# Altium PCB TXdispatcherBoard.PcbDoc
Units mm, origin at the board's own origin, x right, y up, seen from the top; angles counter-clockwise.
Board outline 63.5 x 48.26 mm, 2 copper layers (Top Layer, Bottom Layer); 12 components, 33 nets, 117 pads, 3 vias.
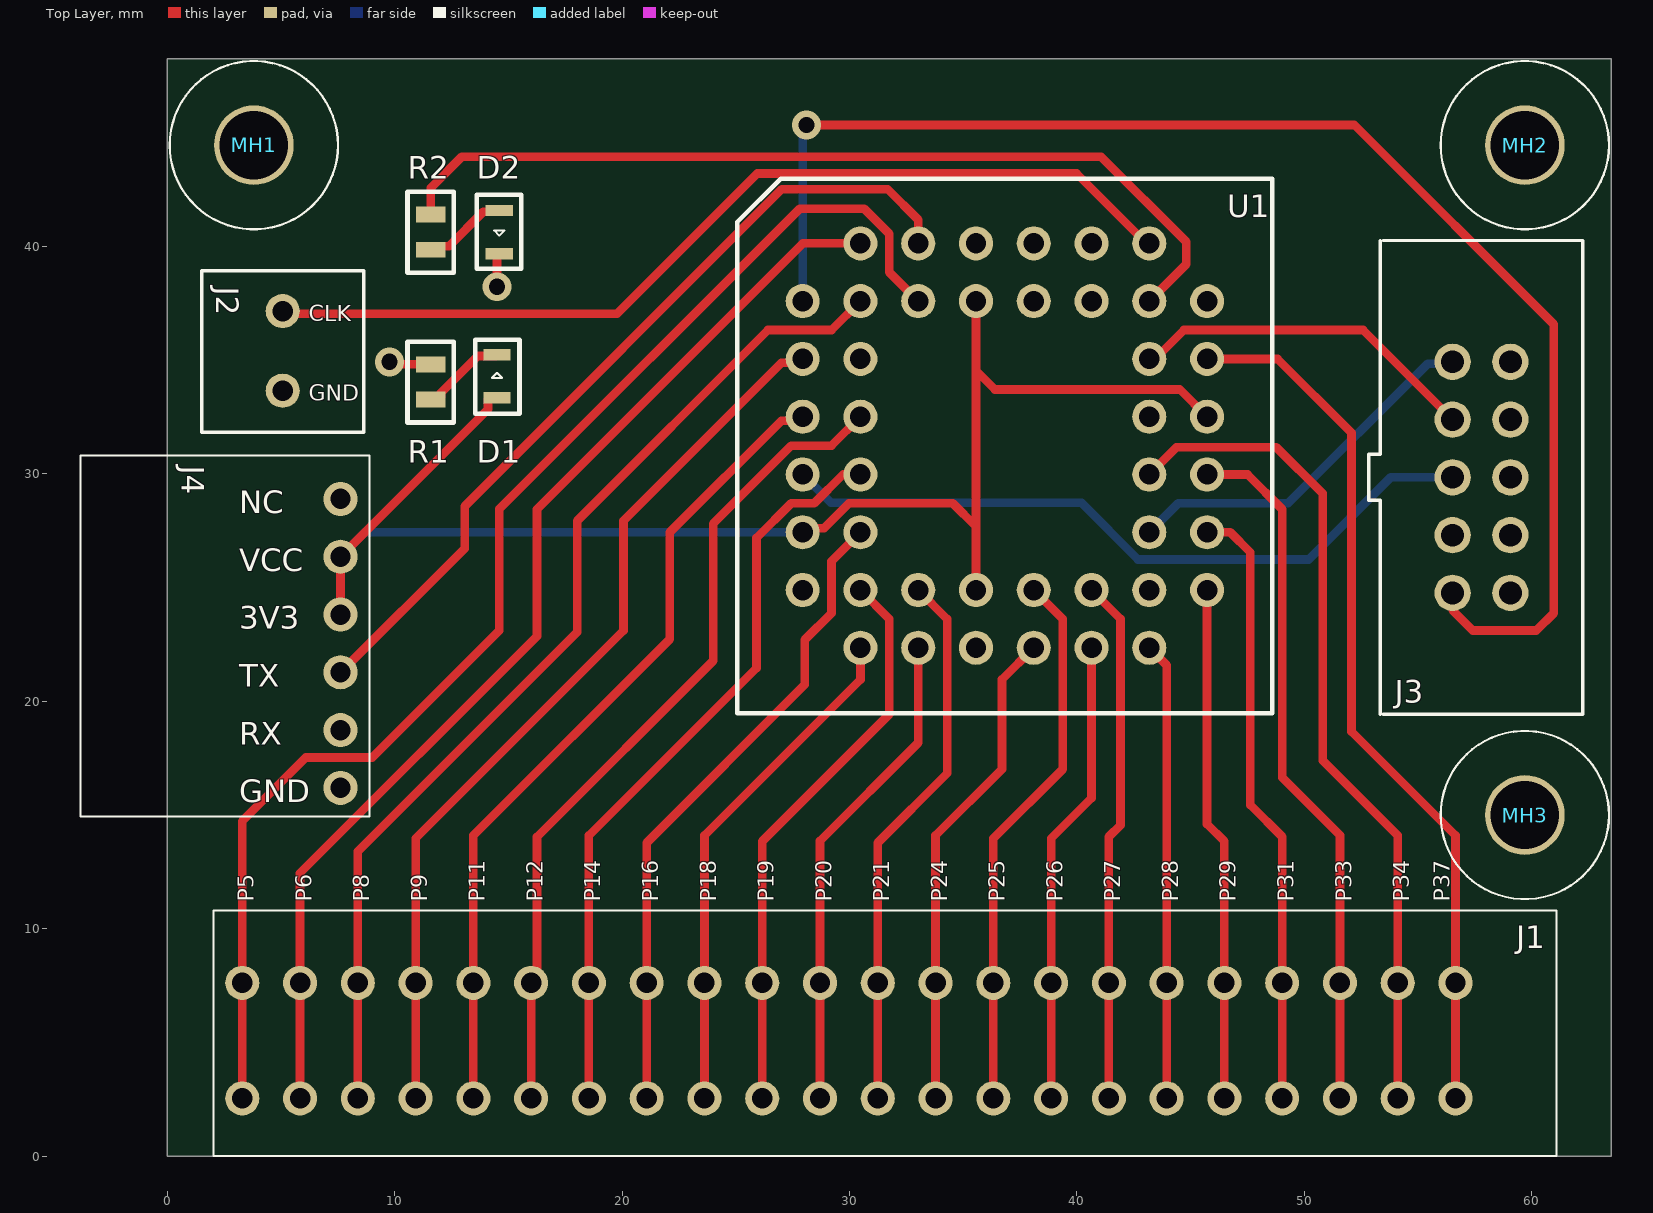
[diagram p0: Top Layer view]
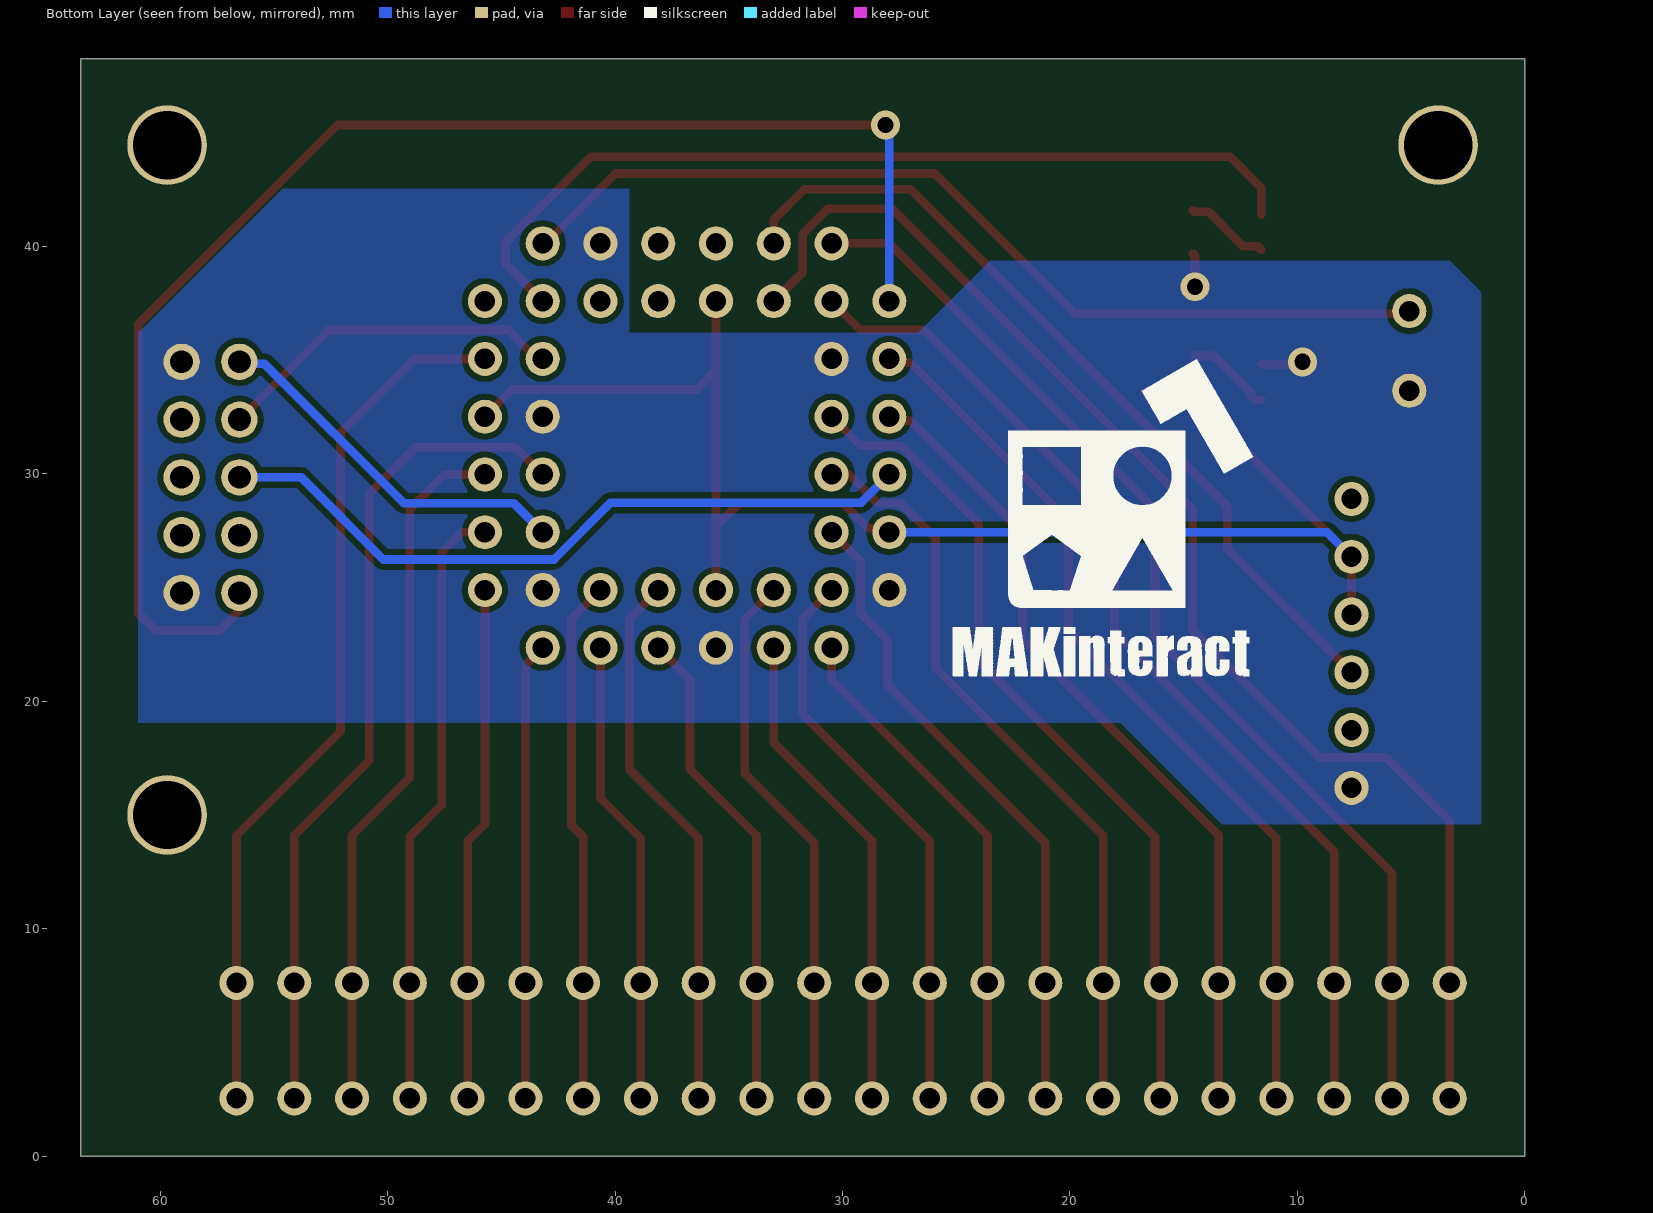
[diagram p1: Bottom Layer view, seen from below]

## Layer stack, top to bottom
Top Solder: solder mask 0.0102, Solder Resist, Dk 3.5
Top Layer: signal copper 0.0356
Dielectric 1: dielectric 0.32, FR-4, Dk 4.8
Bottom Layer: signal copper 0.0356
Bottom Solder: solder mask 0.0102, Solder Resist, Dk 3.5

## Board outline
0,0 63.5,0 63.5,48.26 0,48.26

## Design rules (kind name [scope] priority, off if disabled: settings)
Clearance [All] p1: gap=0.254 ignorepadtopadclearanceinfootprint=FALSE except(0: Arc-Hole Track-Hole SMDPad-Hole THPad-Hole Via-Hole Fill-Hole Poly-Hole Region-Hole Text-Hole)
HoleSize [All] p1: absolutevalues=TRUE maxlimit=7.62 minlimit=0.025 maxpercent=80.000 minpercent=20.000
PolygonConnect [All] p1: connectstyle=Direct reliefconductorwidth=0.254 reliefentries=4 polygonreliefangle="90 Angle" airgapwidth=0.254
RoutingVias [All] p1: holewidth=0.711 width=1.27 viastyle="Through Hole" minholewidth=0.711 minwidth=1.27 maxholewidth=0.711 maxwidth=1.27
SolderMaskExpansion [All] p1: expansion=0.102
Width [All] p1: maxlimit=0.381 minlimit=0.178 preferedwidth=0.254
29 further rules are at their usual default settings.

## Classes and differential pairs
component class TXdispatcherBoard: D1 D2 J2 J3 J4 MH1 MH2 MH3 R1 R2 U1

## Components (designator, comment, footprint, x,y, rotation, side; value= is the part's Value field where it differs from the comment)
D1 "LED0805" LED0805 14.5,34.29 r270 top
D2 "LED0805" LED0805 14.605,40.627 r90 top
J1 "141R-22P" 141R-22P 56.642,7.62 r180 top
J2 "282837-2" 282837-2 5.08,37.155 r270 top
J3 "ALTERA BLASTER" ALTERA_BLASTER 56.515,34.925 r270 top
J4 "USB_FTDI_CONVERTER" USB_FTDI 7.62,28.895 r270 top
MH1 "MH 3.2mm NP" MH3.0MM 3.81,44.45 r0 top
MH2 "MH 3.2mm NP" MH3.0MM 59.69,44.45 r0 top
MH3 "MH 3.2mm NP" MH3.0MM 59.69,15 r0 top
R1 "300" R0805 11.582,34.036 r270 top
R2 "300" R0805 11.582,40.627 r90 top
U1 "EPM3064ALC44-10" PLCC44_DIP 36.83,31.242 r0 top

## Footprints (in the part's own frame and the unit in brackets; to place one, negate y for a bottom-side part, rotate by r counter-clockwise, add the part's x,y. Pads: shape width x height; smd on the part's side, far side on the other; paste and mask are expansions set on the pad)
141R-22P [mm]
  round 1.5 hole 0.9: 1(53.34,0) 1(53.34,5.08) 2(50.8,0) 2(50.8,5.08) 3(48.26,0) 3(48.26,5.08) 4(45.72,0) 4(45.72,5.08) 5(43.18,0) 5(43.18,5.08) 6(40.64,0) 6(40.64,5.08) 7(38.1,0) 7(38.1,5.08) 8(35.56,0) 8(35.56,5.08) 9(33.02,0) 9(33.02,5.08) 10(30.48,0) 10(30.48,5.08) 11(27.94,0) 11(27.94,5.08) 12(25.4,0) 12(25.4,5.08) 13(22.86,0) 13(22.86,5.08) 14(20.32,0) 14(20.32,5.08) 15(17.78,0) 15(17.78,5.08) 16(15.24,0) 16(15.24,5.08) 17(12.7,0) 17(12.7,5.08) 18(10.16,0) 18(10.16,5.08) 19(7.62,0) 19(7.62,5.08) 20(5.08,5.08) 20(5.08,0) 21(2.54,5.08) 21(2.54,0) 22(0,5.08) 22(0,0)
  silkscreen extent -4.45,-3.18 54.61,7.62, body extent -4.22,-5.08 54.05,10.61, height 12.61
282837-2 [mm]
  round 1.5 hole 0.9: 1(0,0) 2(3.5,0)
  silkscreen extent -1.78,-3.56 5.33,3.56, body extent -1.72,-3.37 5.28,3.43, height 9.2
ALTERA_BLASTER [mm]
  round 1.6 hole 1: 1(0,0) 2(0,2.54) 3(2.54,0) 4(2.54,2.54) 5(5.08,0) 6(5.08,2.54) 7(7.62,0) 8(7.62,2.54) 9(10.16,0) 10(10.16,2.54)
  silkscreen extent -5.33,-3.68 15.49,5.72, body extent -5.21,-3.13 15.39,5.67, height 9.11
LED0805 [mm]
  rect 0.5x1.2 smd: 1(-0.95,0) 2(0.95,0)
  silkscreen extent -1.6,-0.97 1.65,0.99, body extent -1.01,-0.62 1.01,0.63, height 1.1
MH3.0MM [mm] "MHNP 3.2mm"
  round 3.5 hole 3 unplated mask+0.05: 1(0,0)
  silkscreen extent -3.7,-3.7 3.7,3.7
PLCC44_DIP [mm]
  round 1.5 hole 0.9: 1(1.27,6.35) 2(-1.27,8.89) 3(-1.27,6.35) 4(-3.81,8.89) 5(-3.81,6.35) 6(-6.35,8.89) 7(-8.89,6.35) 8(-6.35,6.35) 9(-8.89,3.81) 10(-6.35,3.81) 11(-8.89,1.27) 12(-6.35,1.27) 13(-8.89,-1.27) 14(-6.35,-1.27) 15(-8.89,-3.81) 16(-6.35,-3.81) 17(-8.89,-6.35) 18(-6.35,-8.89) 19(-6.35,-6.35) 20(-3.81,-8.89) 21(-3.81,-6.35) 22(-1.27,-8.89) 23(-1.27,-6.35) 24(1.27,-8.89) 25(1.27,-6.35) 26(3.81,-8.89) 27(3.81,-6.35) 28(6.35,-8.89) 29(8.89,-6.35) 30(6.35,-6.35) 31(8.89,-3.81) 32(6.35,-3.81) 33(8.89,-1.27) 34(6.35,-1.27) 35(8.89,1.27) 36(6.35,1.27) 37(8.89,3.81) 38(6.35,3.81) 39(8.89,6.35) 40(6.35,8.89) 41(6.35,6.35) 42(3.81,8.89) 43(3.81,6.35) 44(1.27,8.89)
  silkscreen extent -11.76,-11.76 11.76,11.73, body extent -11.59,-11.59 11.59,11.59, height 9
R0805 [mm]
  rect 0.7x1.3 smd mask+0.02: 1(-0.775,0) 2(0.775,0)
  silkscreen extent -1.78,-1.02 1.78,1.02, body extent -1.15,-0.67 1.15,0.68, height 0.77
USB_FTDI [mm]
  round 1.5 hole 0.9: 1(0,0) 2(2.54,0) 3(5.08,0) 4(7.62,0) 5(10.16,0) 6(12.7,0)
  silkscreen extent -1.91,-11.43 13.97,1.27

## Part data
D1 D2: "LED0805 any color"
J2: "Conn Terminal Blocks F 2 POS 5.08mm Solder ST Thru-Hole 13.5A/Contact", Color=Green, Current=13.5A, Flammability Rating="UL94 V-0", Manufacturer="TE Connectivity", Max Supply Voltage (AC)=250V, Package Quantity=300, Supplier Part Number 1=A113320-ND, Voltage=300V, Approvals=UL, Closed End="No (Without)", ComponentLink1Description=https://datasheet.ciiva.com/819/eng-cs-1308389-eurostyle-terminal-blocks-0607-819104.pdf?src-supplier=Avnet, ComponentLink1URL=https://datasheet.ciiva.com/819/eng-cs-1308389-eurostyle-terminal-blocks-0607-819104.pdf?src-supplier=Avnet, ComponentLink2Description=https://datasheet.ciiva.com/16305/eng-cs-1308389-eurostyle-terminal-blocks-0607-16305248.pdf?src-supplier=Future+Electronics, ComponentLink2URL=https://datasheet.ciiva.com/16305/eng-cs-1308389-eurostyle-terminal-blocks-0607-16305248.pdf?src-supplier=Future+Electronics, ComponentLink3Description=https://datasheet.ciiva.com/19467/750688-19467564.pdf?src-supplier=Jameco, ComponentLink3URL=https://datasheet.ciiva.com/19467/750688-19467564.pdf?src-supplier=Jameco, ComponentLink4Description=https://datasheet.ciiva.com/11758/0900766b80e7dc97-11758677.pdf?src-supplier=RSComponents, ComponentLink4URL=https://datasheet.ciiva.com/11758/0900766b80e7dc97-11758677.pdf?src-supplier=RSComponents, ComponentLink5Description=https://datasheet.ciiva.com/7978/1650926-7978569.pdf?src-supplier=Element14, ComponentLink5URL=https://datasheet.ciiva.com/7978/1650926-7978569.pdf?src-supplier=Element14, ComponentLink6Description=https://datasheet.ciiva.com/14606/70086281-14606908.pdf?src-supplier=Allied+Electronics, ComponentLink6URL=https://datasheet.ciiva.com/14606/70086281-14606908.pdf?src-supplier=Allied+Electronics, ComponentLink7Description=https://datasheet.ciiva.com/30084/eng-cs-1308389-eurostyle-terminal-blocks-0607-30084269.pdf?src-supplier=Onlinecomponents.com, ComponentLink7URL=https://datasheet.ciiva.com/30084/eng-cs-1308389-eurostyle-terminal-blocks-0607-30084269.pdf?src-supplier=Onlinecomponents.com, ComponentLink8Description=https://datasheet.ciiva.com/823/eng-cd-282837-g3-823439.pdf?src-supplier=Digi-Key, ComponentLink8URL=https://datasheet.ciiva.com/823/eng-cd-282837-g3-823439.pdf?src-supplier=Digi-Key, ComponentLink9Description=https://datasheet.ciiva.com/16649/eng-cs-1308389-eurostyle-terminal-blocks-0607-16649391.pdf?src-supplier=Avnet+Europe, ComponentLink9URL=https://datasheet.ciiva.com/16649/eng-cs-1308389-eurostyle-terminal-blocks-0607-16649391.pdf?src-supplier=Avnet+Europe, ComponentLink10Description=https://datasheet.ciiva.com/18620/eng-cd-282837-g3-18620917.pdf?src-supplier=Digi-Key, ComponentLink10URL=https://datasheet.ciiva.com/18620/eng-cd-282837-g3-18620917.pdf?src-supplier=Digi-Key, Connector Type=Receptacle, Contact Material=Brass, Contact Plating=Tin, Current Rating=13.5A, Depth=8.2mm, ELV=Compliant, Gender=Female, Height=11.5mm, Housing Color=Green, Housing Material=Polyamide, Interlock="Yes (With)", Lead Free="Lead Free", Length=10.76mm, Manufacturer Part Number=282837-2, Max Current Rating=13.5A, Max Voltage Rating (AC)=250V, Mount="Through Hole", Number of Circuits=2, Number of Contacts=2, Number of Levels=1, Number of Poles=2, Number of Positions=2, Number of Positions Per Level=2, Number of Rows=1, Orientation=Straight, Packaging=Bulk, Pitch=5.08mm, Plating=Brass, Pricing 1="1 = 1.04000, 10 = 0.64700, 25 = 0.55400, 50 = 0.49780, 100 = 0.48750, 250 = 0.41492, 500 = 0.39416, 1000 = 0.35267, 5000 = 0.27591 (USD)", Radiation Hardening=No, REACH SVHC=Unknown, RoHS=Yes, Screw Flange="No (Without)", Screwless Terminal Block="No (Without)", Side Stackable="Yes (With)", Stock 1=133598, Supplier 1=Digi-Key, Tail Length=3.5mm, Termination=Solder, Thread Size=M3, Voltage Rating=250V, Voltage Rating (AC)=250V, Width=11.5mm, Wire/Cable Gauge=30AWG, Wire Gauge (Max)=28AWG, Wire Gauge (Min)=16AWG
J3: library part ALTERA_JTAG
MH1 MH2 MH3: library part MHNP, "Mounting hole 3.2mm non plated"
R1 R2: library part R0805
U1: "IC CPLD 64MC 10NS 44PLCC", Case/Package=PLCC, Frequency=125MHz, Manufacturer="Intel Altera", Max Frequency=222.2MHz, Max Operating Temperature=70°C, Max Supply Voltage=3.6V, Min Operating Temperature=0°C, Min Supply Voltage=3V, Operating Supply Voltage=3.3V, Package Quantity=130, ComponentLink1Description=https://datasheet.ciiva.com/29887/1723147-29887635.pdf?src-supplier=Jameco, ComponentLink1URL=https://datasheet.ciiva.com/29887/1723147-29887635.pdf?src-supplier=Jameco, ComponentLink2Description=https://datasheet.ciiva.com/15102/getdatasheetpartid-224088-15102743.pdf?src-supplier=Verical, ComponentLink2URL=https://datasheet.ciiva.com/15102/getdatasheetpartid-224088-15102743.pdf?src-supplier=Verical, ComponentLink3Description=https://datasheet.ciiva.com/1406/m3000a-1406963.pdf?src-supplier=Digi-Key, ComponentLink3URL=https://datasheet.ciiva.com/1406/m3000a-1406963.pdf?src-supplier=Digi-Key, Height=3.81mm, Lead Free="Contains Lead", Length=16.59mm, Manufacturer Part Number=EPM3064ALC44-10, Memory Type=EEPROM, Mount="Surface Mount", Number of Gates=1250, Number of I/Os=34, Number of Logic Blocks (LABs)=4, Number of Logic Elements/Cells=4, Number of Macrocells=64, Number of Pins=44, Number of Programmable I/O=34, Packaging=Rail/Tube, Propagation Delay=10ns, Radiation Hardening=No, RoHS=Yes, Speed Grade=10, Stock 1=0, Supplier 1=Digi-Key, Turn-On Delay Time=10ns, Width=16.59mm
J1: ComponentLink1Description=Datasheet, ComponentLink1URL=https://www.dinkle.com/en/terminal/outpagepdf.php?dpid=94&outpdf=1

## Via types
v1: diameter 1.27, hole 0.711, Top Layer to Bottom Layer, tented both sides, 3 vias

## Nets (pads, with @x,y where several pads share a name; then routed paths per layer and width w, separated by ;. In a path a pad name is that pad's centre, name@x,y a point inside that pad or via, vN(x,y) a via of type N, cw(c..) or ccw(c..) an arc to the next point about the centre after c; other vN are vias at no path point)
+3V3: D1.2 J4.2 J4.3 U1.3 U1.15 U1.23 U1.35 | length 65.9
  Top Layer w0.381: J4.3 J4.2 14.104,32.839 14.104,33.28 14.164,33.34 D1.2 ; U1.15 28.112,27.604 28.874,27.604 29.972,28.702 34.544,28.702 35.56,27.686 ; U1.23 35.56,27.686 ; U1.3 35.56,34.544 ; U1.35 44.525,33.707 36.397,33.707 35.56,34.544 ; 35.56,27.686 35.56,34.544
  Bottom Layer w0.381: J4.2 8.697,27.432 U1.15 U1.15@28.154,27.218
EXT_CLK: J2.1 U1.40 | length 42
  Top Layer w0.381: J2.1 5.197,37.038 19.773,37.038 25.94,43.205 39.98,43.205 43.053,40.132 U1.40
GND: D2.1 J2.2 J3.2 J3.10 J4.6 R1.1 U1.10 U1.17 U1.22 U1.30 U1.36 U1.42 | length 3.4
  Top Layer w0.381: v1(9.779,34.925) 9.893,34.811 R1.1 ; v1(14.5,38.227) 14.5,39.617 14.559,39.677 D2.1
  Bottom Layer w0.381: v1@14.478,38.227 v1(14.5,38.227)
IN: J4.4 U1.4 | length 36.9
  Top Layer w0.381: J4.4 7.635,21.275 13.081,26.721 13.081,28.575 27.026,42.52 31.674,42.52 33.02,41.173 U1.4
NetD1_1: D1.1 R1.2 | length 3.8
  Top Layer w0.381: R1.2 11.882,33.261 12.042,33.421 12.042,33.566 13.66,35.184 14.444,35.184 D1.1
NetD2_2: D2.2 R2.1 | length 3.7
  Top Layer w0.381: R2.1 11.742,40.011 12.388,40.011 13.894,41.517 14.546,41.517 D2.2
NetJ3_1: J3.1 U1.32 | length 16.4
  Bottom Layer w0.381: U1.32 44.45,28.702 49.276,28.702 55.418,34.844 56.434,34.844 J3.1
NetJ3_3: J3.3 U1.38 | length 15.5
  Top Layer w0.381: U1.38 43.434,35.052 44.704,36.322 52.578,36.322 J3.3
NetJ3_5: J3.5 U1.13 | length 31.6
  Bottom Layer w0.381: U1.13 29.185,28.727 40.195,28.727 42.685,26.237 50.19,26.237 53.797,29.845 J3.5
NetJ3_9: J3.9 U1.7 | length 62.9
  Top Layer w0.381: v1(28.112,45.339) 52.197,45.339 60.96,36.576 60.96,23.876 60.198,23.114 57.404,23.114 56.515,24.003 J3.9
  Bottom Layer w0.381: U1.7 27.94,45.167 v1(28.112,45.339)
NetR2_2: R2.2 U1.41 | length 39.8
  Top Layer w0.381: R2.2 11.582,42.57 12.954,43.942 41.059,43.942 44.8,40.201 44.8,39.212 U1.41
OUT0: J1.1 U1.5 | length 59.2
  Top Layer w0.254: J1.1@3.048,2.794 J1.1@3.302,2.54
  Top Layer w0.381: J1.1@3.302,2.54 3.302,7.62 3.302,14.732 6.096,17.526 9.017,17.526 14.605,23.114 14.605,28.453 27.808,41.656 30.645,41.656 31.75,40.551 31.75,38.862 U1.5
OUT1: J1.2 U1.6 | length 49.3
  Top Layer w0.381: J1.2@5.842,2.54 5.842,7.62 5.842,12.446 16.256,22.86 16.256,28.448 27.94,40.132 U1.6
OUT2: J1.3 U1.8 | length 45.8
  Top Layer w0.381: J1.3@8.382,2.54 8.382,7.62 8.382,13.393 18.034,23.045 18.034,27.94 26.416,36.322 29.21,36.322 U1.8
OUT3: J1.4 U1.9 | length 40
  Top Layer w0.381: J1.4@10.922,2.54 10.922,7.62 10.922,13.97 20.066,23.114 20.066,27.94 27.006,34.88 27.768,34.88 U1.9
OUT4: J1.5 U1.11 | length 36.4
  Top Layer w0.381: J1.5@13.462,2.54 13.462,7.62 13.462,14.097 22.098,22.733 22.098,27.432 27.006,32.34 27.768,32.34 U1.11
OUT5: J1.6 U1.12 | length 37
  Top Layer w0.381: J1.6@16.002,2.54 16.002,7.62 16.256,7.874 16.256,14.036 24.003,21.783 24.003,27.813 27.432,31.242 29.21,31.242 U1.12
OUT6: J1.7 U1.14 | length 33.4
  Top Layer w0.381: J1.7@18.542,2.54 18.542,7.62 18.542,14.097 25.908,21.463 25.908,27.178 27.432,28.702 28.448,28.702 29.718,29.972 U1.14
OUT7: J1.8 U1.16 | length 28.8
  Top Layer w0.381: J1.8@21.082,2.54 21.082,7.62 21.082,13.782 28.034,20.734 28.034,22.7 29.21,23.876 29.21,26.162 U1.16
OUT8: J1.9 U1.18 | length 22.7
  Top Layer w0.381: J1.9@23.622,2.54 23.622,7.62 23.622,14.097 30.48,20.955 U1.18
OUT9: J1.10 U1.19 | length 25.2
  Top Layer w0.381: J1.10@26.162,2.54 26.162,7.62 26.162,13.843 31.75,19.431 31.75,23.622 U1.19
OUT10: J1.11 U1.20 | length 21.6
  Top Layer w0.381: J1.11@28.702,2.54 28.702,7.62 28.702,13.857 33.02,18.175 U1.20
OUT11: J1.12 U1.21 | length 24.1
  Top Layer w0.381: J1.12@31.242,2.54 31.242,7.62 31.242,13.782 34.29,16.83 34.29,23.622 U1.21
OUT12: J1.13 U1.24 | length 21.6
  Top Layer w0.381: J1.13@33.782,2.54 33.782,7.62 33.782,14.097 36.703,17.018 36.703,20.955 U1.24
OUT13: J1.14 U1.25 | length 24.1
  Top Layer w0.381: J1.14@36.322,2.54 36.322,7.62 36.322,13.97 39.37,17.018 39.37,23.622 U1.25
OUT14: J1.15 U1.26 | length 20.5
  Top Layer w0.381: J1.15@38.862,2.54 38.862,7.62 38.862,13.97 40.64,15.748 U1.26
OUT15: J1.16 U1.27 | length 23.1
  Top Layer w0.381: U1.27 41.91,23.622 41.91,14.553 41.402,14.045 41.402,7.62 J1.16@41.402,2.54
OUT16: J1.17 U1.28 | length 20.1
  Top Layer w0.381: U1.28 43.942,21.59 43.942,7.62 J1.17@43.942,2.54
OUT17: J1.18 U1.29 | length 22.7
  Top Layer w0.381: U1.29 45.72,14.605 46.482,13.843 46.482,7.62 J1.18@46.482,2.54
OUT18: J1.19 U1.31 | length 26.9
  Top Layer w0.381: U1.31 46.735,27.432 47.625,26.542 47.625,15.442 49.022,14.045 49.022,7.62 J1.19@49.022,2.54
OUT19: J1.20 U1.33 | length 30.9
  Top Layer w0.381: U1.33 47.497,29.972 49.022,28.447 49.022,16.65 51.562,14.11 51.562,7.62 J1.20@51.562,2.54
OUT20: J1.21 U1.34 | length 36.9
  Top Layer w0.381: U1.34 44.375,31.167 48.767,31.167 50.8,29.134 50.8,17.399 54.102,14.097 54.102,7.62 J1.21@54.102,2.54
OUT21: J1.22 U1.37 | length 38.9
  Top Layer w0.381: U1.37 48.82,35.052 52.07,31.802 52.07,18.669 56.642,14.097 56.642,7.62 J1.22@56.642,2.54
pads on no net: J3.4 J3.6 J3.7 J3.8 J4.1 J4.5 MH1.1 MH2.1 MH3.1 U1.1 U1.2 U1.39 U1.43 U1.44

## Polygon pours and split planes (outlines as drawn)
GND on Bottom Layer "Bottom Layer-GND" (solid, pour order 0): 39.37,42.545 54.61,42.545 60.96,36.195 60.96,19.05 17.78,19.05 13.335,14.605 1.905,14.605 1.905,37.973 3.302,39.37 23.495,39.37 26.67,36.195 39.37,36.195

## Silkscreen, mask and mechanical layers (free items; w line width, h text height)
Top Overlay:
  text "CLK" at 6.223,36.703 h0.7
  text "GND" at 6.223,33.203 h0.7
  text "P5" at 3.81,11.176 h0.7 r90
  text "P6" at 6.35,11.176 h0.7 r90
  text "P8" at 8.89,11.176 h0.7 r90
  text "P9" at 11.43,11.176 h0.7 r90
  text "P11" at 13.97,11.176 h0.7 r90
  text "P12" at 16.51,11.176 h0.7 r90
  text "P14" at 19.05,11.176 h0.7 r90
  text "P16" at 21.59,11.176 h0.7 r90
  text "P18" at 24.13,11.176 h0.7 r90
  text "P19" at 26.67,11.176 h0.7 r90
  text "P20" at 29.21,11.176 h0.7 r90
  text "P21" at 31.75,11.176 h0.7 r90
  text "P24" at 34.29,11.176 h0.7 r90
  text "P25" at 36.83,11.176 h0.7 r90
  text "P26" at 39.37,11.176 h0.7 r90
  text "P27" at 41.91,11.176 h0.7 r90
  text "P28" at 44.45,11.176 h0.7 r90
  text "P29" at 46.99,11.176 h0.7 r90
  text "P31" at 49.53,11.176 h0.7 r90
  text "P33" at 52.07,11.176 h0.7 r90
  text "P34" at 54.61,11.176 h0.7 r90
  text "P37" at 56.388,11.176 h0.7 r90
Bottom Overlay:
  drawing of 14 lines, arcs and shapes, not listed
Boardcut:
  the board outline again, w0.09

## Text inside footprints (layer, text, board x,y; h text height)
J4: Top Overlay "NC" at 3.175,28.26 h1; Top Overlay "TX" at 3.175,20.64 h1; Top Overlay "VCC" at 3.175,25.72 h1; Top Overlay "3V3" at 3.175,23.18 h1; Top Overlay "RX" at 3.175,18.1 h1; Top Overlay "GND" at 3.175,15.56 h1